# Altium PCB PCB1.PcbDoc
Units mm, origin at the board's own origin, x right, y up, seen from the top; angles counter-clockwise.
Board outline 145.1 x 117 mm, 2 copper layers (L1 (Sig), L2 (Sig)), stack 1.041 mm thick; 75 components, 45 nets, 245 pads, 288 vias.
Unrouted connection lines stored in the file: 1.
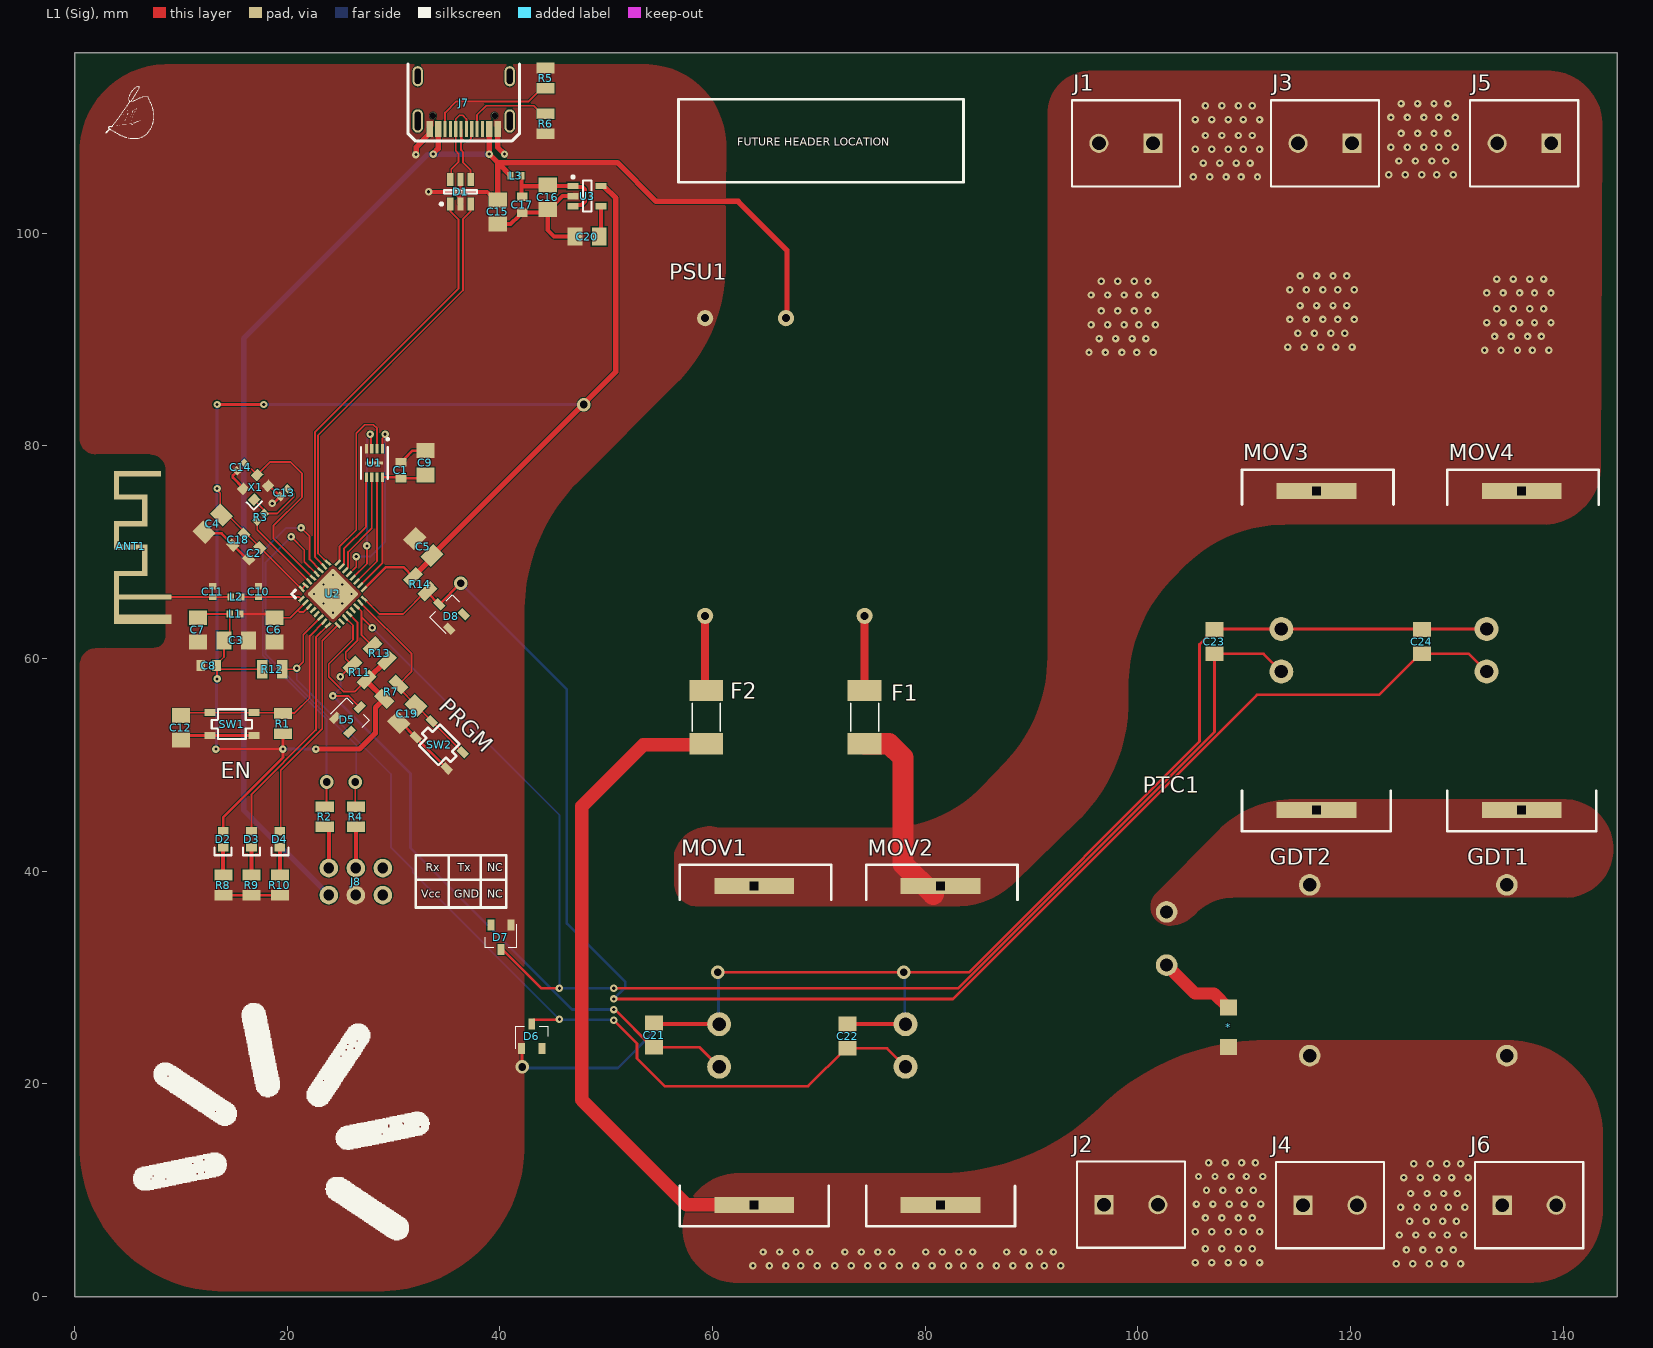
[diagram p0: L1 (Sig) view]
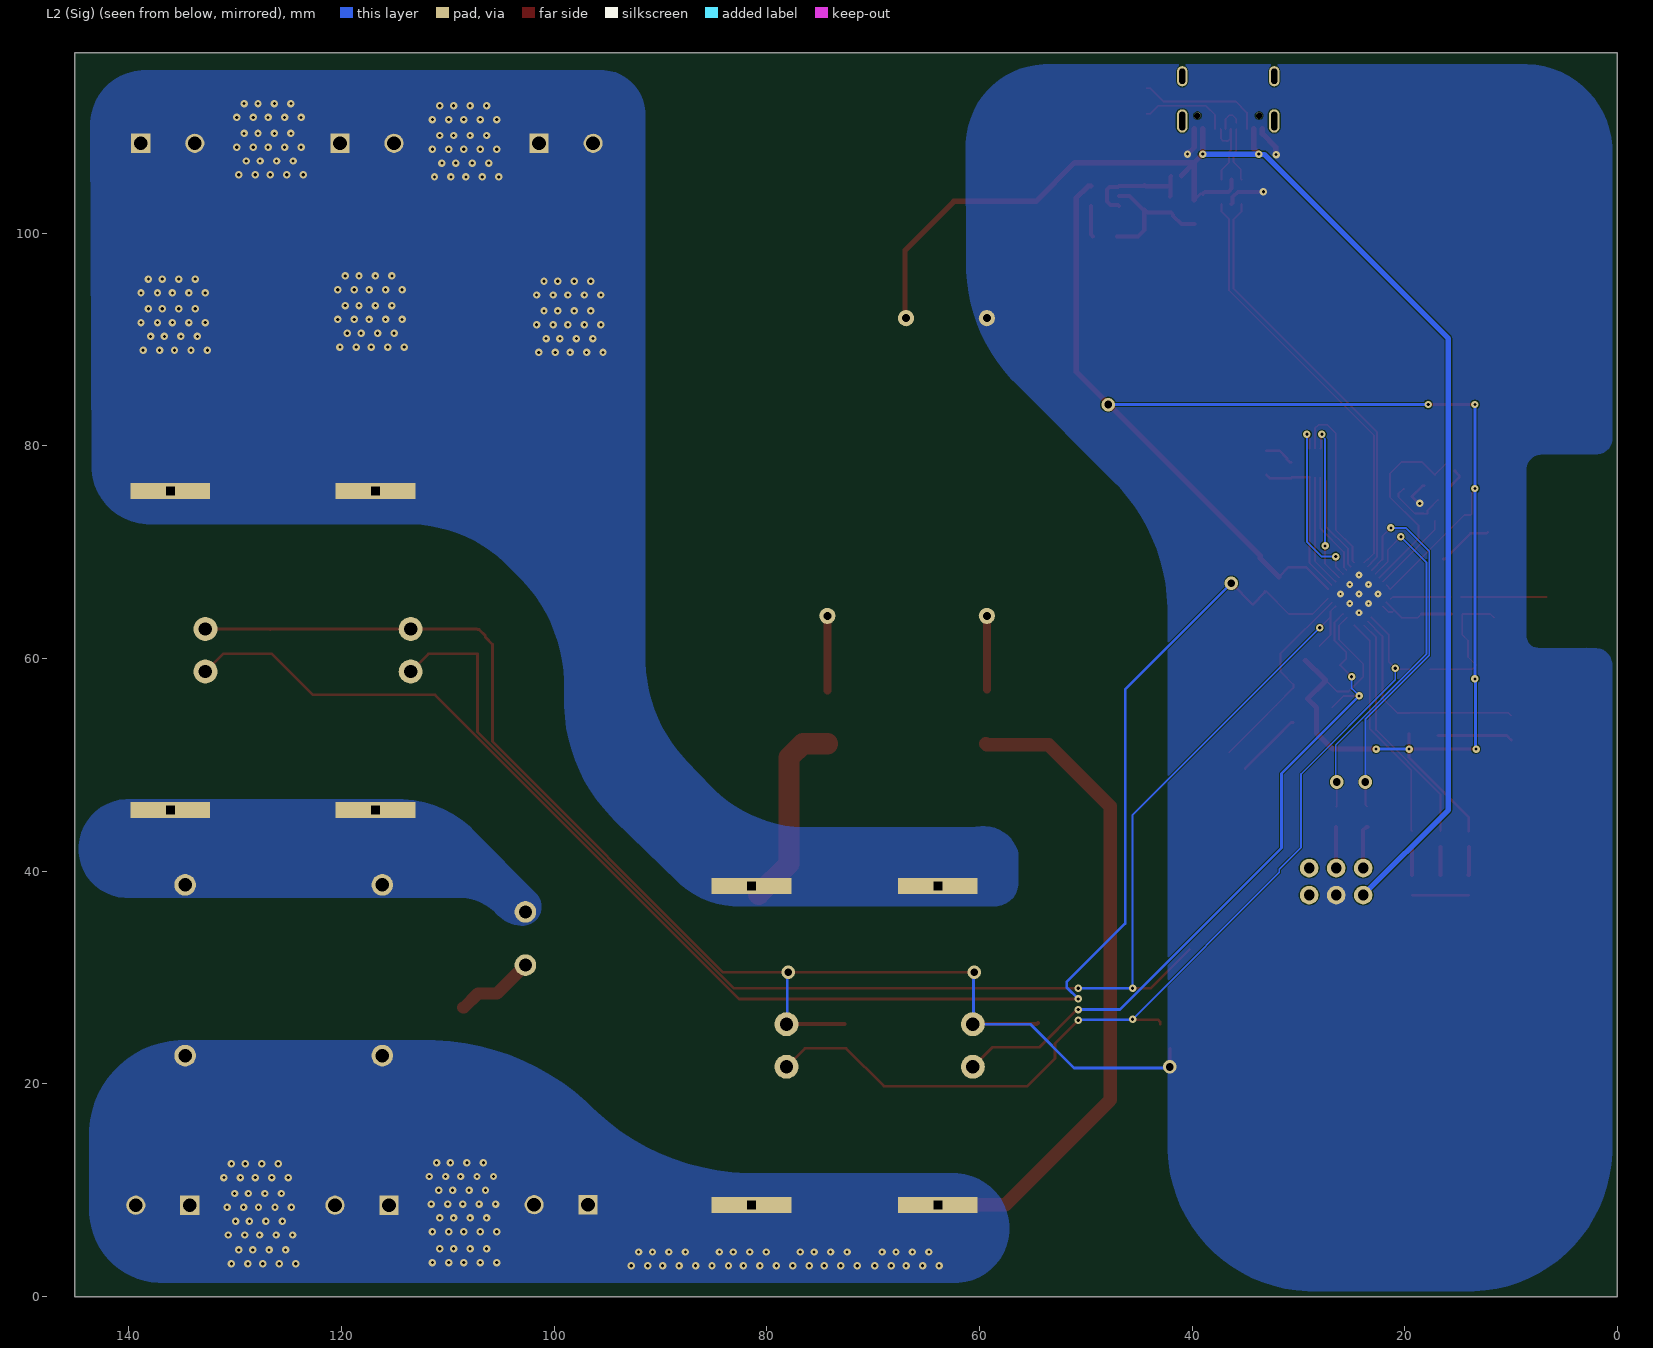
[diagram p1: L2 (Sig) view, seen from below]
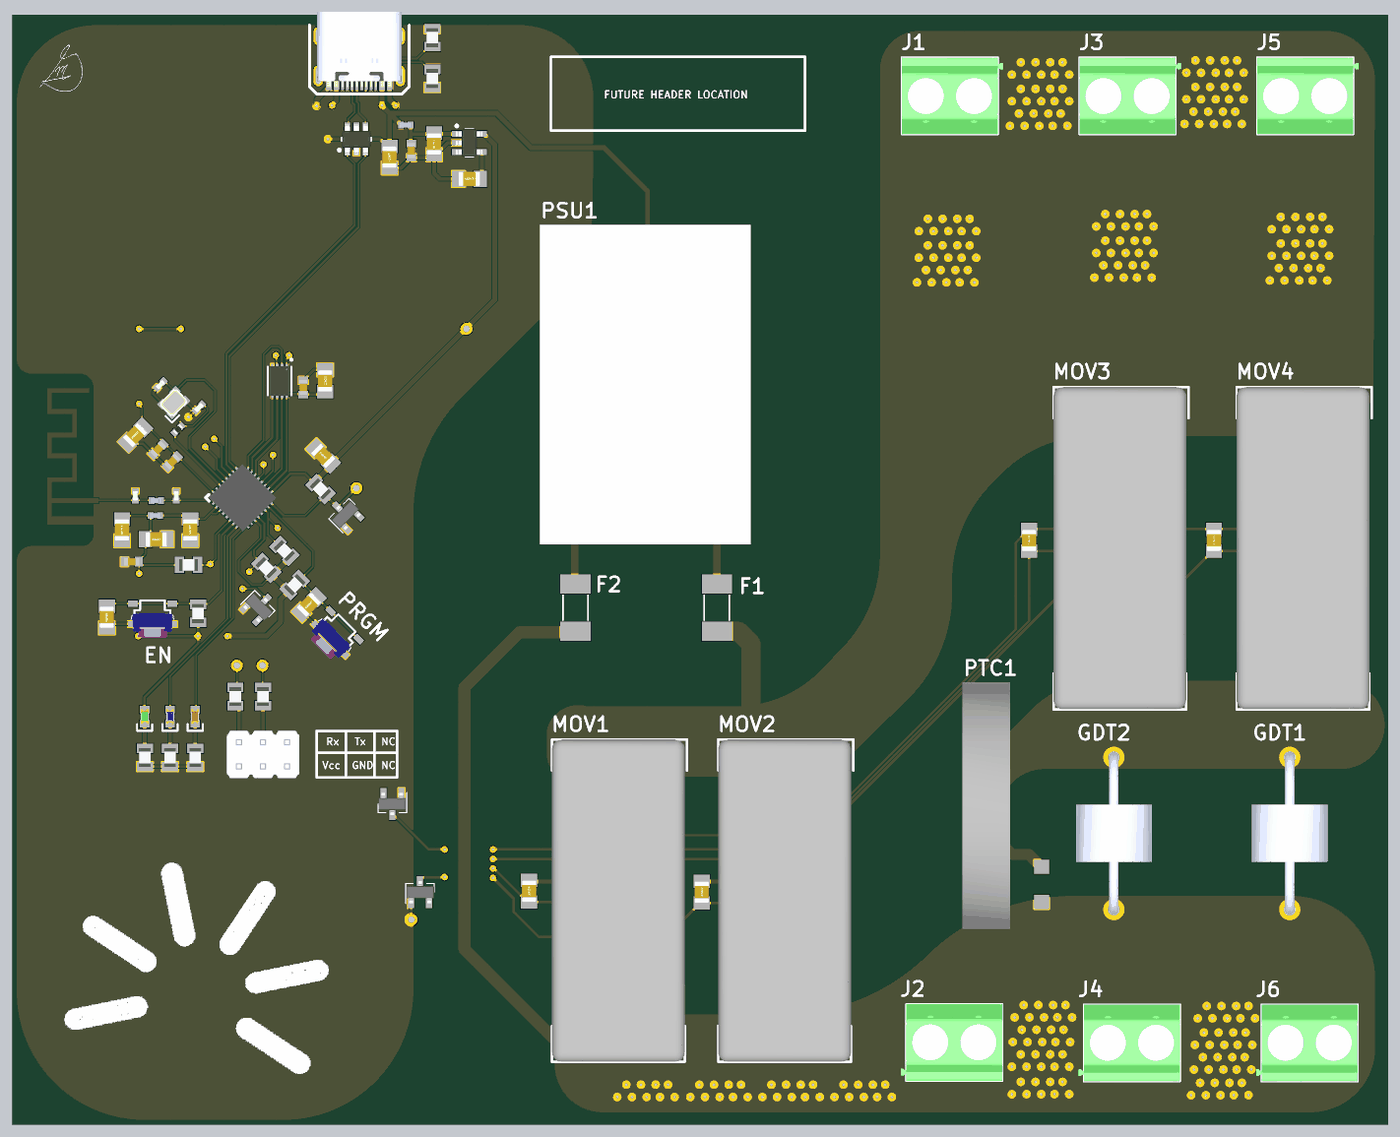
[diagram p2: 3D render of the assembled board from above, using the file's embedded part models]

## Layer stack, top to bottom
Top Solder: solder mask 0.0102, Solder Resist, Dk 3.5
L1 (Sig): signal copper 0.0356
Dielectric 2: prepreg 0.1295, PP-017, Dk 4.3
Dielectric 1: core 0.7112, Core-039, Dk 4.8
Dielectric 3: prepreg 0.1295, PP-017, Dk 4.3
L2 (Sig): signal copper 0.0356
Bottom Solder: solder mask 0.0102, Solder Resist, Dk 3.5

## Board outline
0,0 0,117 145.1,117 145.1,0

## Design rules (kind name [scope] priority, off if disabled: settings)
Clearance [All] p1: gap=0.1 ignorepadtopadclearanceinfootprint=FALSE
DiffPairsRouting [All] p1: maxlimit=0.254 minlimit=0.254 mostfreqgap=0.254 toplayer_minwidth=0.1 toplayer_maxwidth=0.381 toplayer_prefwidth=0.381 bottomlayer_minwidth=0.1 bottomlayer_maxwidth=0.381 bottomlayer_prefwidth=0.381 maxuncoupledlength=12.7
PlaneConnect [All] p1: planeconnectstyle=Direct reliefexpansion=0.508 reliefentries=4 reliefconductorwidth=0.254 reliefairgap=0.254
PolygonConnect [All] p1: connectstyle=Direct reliefconductorwidth=0.254 reliefentries=4 polygonreliefangle="90 Angle" airgapwidth=0.254
RoomDefinition Sheet2 [InComponentClass('Sheet2')] p1: confinementstyle=ConfineIn formatcopy=TRUE lockcomponents=FALSE outline 96.243,56.905 425.173,56.905 425.173,93.481 96.243,93.481
RoomDefinition Sheet1 [InComponentClass('Sheet1')] p2: confinementstyle=ConfineIn formatcopy=TRUE lockcomponents=FALSE outline 96.243,18.424 246.103,18.424 246.103,55.508 96.243,55.508
RoutingVias [All] p1: holewidth=0.711 width=1.27 viastyle="Through Hole" minholewidth=0.381 minwidth=0.254 maxholewidth=1.27 maxwidth=5.08
SolderMaskExpansion [All] p1: expansion=0.102 istentingtop=FALSE
Width [All] p1: maxlimit=2.54 minlimit=0.1 preferedwidth=0.254
28 further rules are at their usual default settings.

## Classes and differential pairs
differential pair class DIFF_USB: MCU_USB_D USB_D
component class Sheet2: ANT1 C1 C2 C3 C4 C5 C6 C7 C8 C9 C10 C11 C12 C13 C14 C15 C16 C17 C18 C19 C20 C21 C22 C23 C24 D1 D2 D3 D4 D5 D6 D7 D8 F1 F2 J7 J8 L1 L2 L3 PSU1 R1 R2 R3 R4 R5 R6 R7 R8 R9 R10 R11 R12 R13 R14 SW1 SW2 U1 U2 U3 X1
component class Sheet1: * GDT1 GDT2 J1 J2 J3 J4 J5 J6 MOV1 MOV2 MOV3 MOV4 PTC1
differential pair USB_D: +USB_D_P -USB_D_N
differential pair MCU_USB_D: +MCU_USB_D_P -MCU_USB_D_N

## Components (designator, comment, footprint, x,y, rotation, side; value= is the part's Value field where it differs from the comment)
* "IND_1812" IND_1812 108.538,23.48 r90 top
ANT1 "PCB Antenna 2.4GHz 50Ohm" ANT_IFA_USB_2_4GHZ_50R 9.1,63.7 r90 top
C1 "10u" CAP_0603 30.7,77.722 r270 top
C2 "10u" CAP_0603 16.9,69.9 r45 top
C3 "100n" CAP_0805 15.2,61.707 r180 top
C4 "100n" CAP_0805 13,72.7 r45 top
C5 "100n" CAP_0805 32.8,70.5 r315 top
C6 "100n" CAP_0805 18.8,62.7 r90 top
C7 "100n" CAP_0805 11.6,62.7 r90 top
C8 "10u" CAP_0603 12.6,59.35 r0 top
C9 "100n" CAP_0805 33,78.415 r270 top
C10 "3p3" CAP_0402 17.3,66.3 r270 top
C11 "3p3" CAP_0402 13,66.3 r270 top
C12 "100n" CAP_0805 10,53.5 r90 top
C13 "10p" CAP_0402 19.7,75.6 r45 top
C14 "10p" CAP_0402 15.634,78.017 r45 top
C15 "100n" CAP_0805 39.8,102.007 r90 top
C16 "100n" CAP_0805 44.5,103.4 r90 top
C17 "10u" CAP_0603 42.1,102.7 r90 top
C18 "10u" CAP_0603 15.4,71.2 r45 top
C19 "100n" CAP_0805 31.3,54.8 r45 top
C20 "100n" CAP_0805 48.2,99.7 r0 top
C21 "100n" CAP_0805 54.5,24.6 r270 top
C22 "100n" CAP_0805 72.7,24.5 r270 top
C23 "100n" CAP_0805 107.2,61.6 r270 top
C24 "100n" CAP_0805 126.7,61.6 r270 top
D1 "USBLC6-2SC6" STM-SOT23-6L_V 36.3,103.9 r90 top
D2 "GREEN" LED_0603_GREEN 13.978,43.017 r90 top
D3 "BLUE" LED_0603_BLUE 16.645,43.017 r90 top
D4 "RED" LED_0603_RED 19.312,43.017 r90 top
D5 "Diode, Zener, BZX84C18" SOT23 26,54.6 r45 top
D6 "Diode, Zener, BZX84C18" SOT23 43,24.5 r90 top
D7 "Diode, Zener, BZX84C18" SOT23 40.1,33.8 r270 top
D8 "Diode, Zener, BZX84C18" SOT23 35.1,64.3 r135 top
F1 "1A" FUSE_6125N 74.3,54.5 r90 top
F2 "1A" FUSE_6125N 59.4,54.5 r90 top
GDT1 "B88069X2250S102" B88069X2250S102 134.7,38.72 r270 top
GDT2 "B88069X2250S102" B88069X2250S102 116.158,38.72 r270 top
J1 "1729128" PHOE-1729128-2_V 98.868,108.467 r180 top
J2 "1729128" PHOE-1729128-2_V 99.338,8.645 r0 top
J3 "1729128" PHOE-1729128-2_V 117.599,108.467 r180 top
J4 "1729128" PHOE-1729128-2_V 118.069,8.6 r0 top
J5 "1729128" PHOE-1729128-2_V 136.33,108.467 r180 top
J6 "1729128" PHOE-1729128-2_V 136.8,8.6 r0 top
J7 "TYPE-C-31-M-12" TYPE-C-31-M-12 36.601,112.667 r180 top
J8 "PH2-06-UA" PH2-06-UA 23.911,40.303 r270 top
L1 "2n2" IND_0402 15.1,64.2 r0 top
L2 "2n2" IND_0402 15.2,65.8 r0 top
L3 "2n2" IND_0402 41.5,105.4 r180 top
MOV1 "TFMOV10M175" TFMOV10M175 63.921,8.622 r90 top
MOV2 "TFMOV10M175" TFMOV10M175 81.447,8.622 r90 top
MOV3 "TFMOV10M175" TFMOV10M175 116.791,45.786 r90 top
MOV4 "TFMOV10M175" TFMOV10M175 136.095,45.786 r90 top
PSU1 "IRM-02-3.3" IRM-02-3.3 59.306,64.021 r270 top
PTC1 "B59810C0120A070" B59810C0120A070 102.696,36.18 r270 top
R1 "5k1" RES_0805 19.6,53.893 r270 top
R2 "470" RES_0805 23.53,45.129 r270 top
R3 "22R" RES_0402 17.5,73.3 r45 top
R4 "470" RES_0805 26.451,45.129 r270 top
R5 "5k1" RES_0805 44.3,114.6 r270 top
R6 "5k1" RES_0805 44.3,110.3 r90 top
R7 "5k1" RES_0805 29.8,56.9 r225 top
R8 "1k" RES_0805 14,38.7 r90 top
R9 "1k" RES_0805 16.645,38.7 r90 top
R10 "1k" RES_0805 19.312,38.7 r90 top
R11 "5k1" RES_0805 26.8,58.7 r315 top
R12 "5k1" RES_0805 18.6,59 r180 top
R13 "5k1" RES_0805 28.7,60.5 r315 top
R14 "5k1" RES_0805 32.51,67.01 r135 top
SW1 "SKRPANE010" SKRPANE010 14.8,53.845 r180 top
SW2 "SKRPANE010" SKRPANE010 34.3,51.9 r135 top
U1 "W25Q16JVUXIQ" USON-8-2X3MM 28.2,78.4 r270 top
U2 "ESP32-C3" QFN32-5x5 24.292,66.084 r45 top
U3 "SPX3819M5-L-3-3/TR" SOT-23-5 48.2,103.5 r0 top
X1 "40MHz" XTAL_2520 17.031,76.112 r225 top

## Footprints (in the part's own frame and the unit in brackets; to place one, negate y for a bottom-side part, rotate by r counter-clockwise, add the part's x,y. Pads: shape width x height; smd on the part's side, far side on the other; paste and mask are expansions set on the pad)
ANT_IFA_USB_2_4GHZ_50R [mm]
  rect 5x0.5 smd paste-2539.97 mask+0.102: 1(2.05,5.15)
  rect 0.5x4.9 smd paste-2539.97 mask+0.102: 1(2.1,2.45)
  rect 0.5x2.64 smd paste-2539.97 mask+0.102: 1(4.3,3.58) 1(6.8,3.58) 1(9,3.58) 1(11.5,3.58)
  rect 2x0.5 smd paste-2539.97 mask+0.102: 1(5.55,2.51) 1(10.25,2.51)
  rect 2.7x0.5 smd paste-2539.97 mask+0.102: 1(7.9,5.15) 1(12.6,5.15)
  rect 0.5x3.94 smd paste-2539.97 mask+0.102: 1(13.7,2.93)
  rect 0.9x4.9 smd paste-2539.97 mask+0.102: 2(0,2.45)
B59810C0120A070 [mil] "PTC, 2.6OHM"
  round 80 hole 47.24: 1(0,0) 2(196.85,0)
  body extent -412,-98 612,98, height 1412
B88069X2250S102 [mil] "230V 20kA GDT"
  round 80 hole 50: 1(0,0) 2(631.89,0)
  body extent -20,-157 651,157, height 332
CAP_0402 [mm]
  rect 0.6x0.7 smd: 1(-0.5,0) 2(0.5,0)
  body extent -0.5,-0.26 0.5,0.26, height 0.37
CAP_0603 [mm]
  rect 0.8x1 smd: 1(-0.75,0) 2(0.75,0)
  body extent -0.8,-0.4 0.8,0.4, height 0.51
CAP_0805 [mm]
  rect 1.4x1.7 smd: 1(-1.143,0) 2(1.143,0)
  body extent -1.15,-0.76 1.15,0.79, height 1.01
FUSE_6125N [mm] "FUSE BRD MNT 4A 125V"
  rect 2x3.18 smd: 1(-2.5,0) 2(2.5,0)
  silkscreen extent -1.32,-1.32 1.32,1.32, body extent -3.18,-1.32 3.17,1.32, height 2.64
IND_0402 [mm]
  rect 0.6x0.7 smd: 1(-0.5,0) 2(0.5,0)
  body extent -0.56,-0.26 0.56,0.26, height 0.67
IND_1812 [mm]
  rect 1.5x1.6 smd: 1(0,0) 2(3.7,0)
  body extent -0.32,-1.65 3.87,1.65, height 3.2
IRM-02-3.3 [mil] "POWER SUPPLY, 3.3V"
  round 60 hole 30: 1(0,590.55) 2(0,0) 3(-1102.36,0) 4(-1102.36,299.21)
  body extent -1215,-144 112,730, height 591
LED_0603_BLUE [mm]
  rect 0.8x1 smd: A(0.75,0) K(-0.75,0)
  silkscreen extent -1.5,-0.8 -0.8,0.8, body extent -0.8,-0.4 0.8,0.4, height 0.6
LED_0603_GREEN [mm]
  rect 0.8x1 smd: A(0.75,0) K(-0.75,0)
  silkscreen extent -1.5,-0.8 -0.8,0.8, body extent -0.8,-0.4 0.8,0.4, height 0.6
LED_0603_RED [mm]
  rect 0.8x1 smd: A(0.75,0) K(-0.75,0)
  silkscreen extent -1.5,-0.8 -0.8,0.8, body extent -0.8,-0.4 0.8,0.4, height 0.6
PH2-06-UA [mm] "Six pin header (3x2)"
  round 1.75 hole 1.016: 1(0,0) 2(2.54,0) 3(0,2.54) 4(2.54,2.54) 5(0,5.08) 6(2.54,5.08)
  body extent -1.23,-1.27 3.77,6.35, height 8.25
PHOE-1729128-2_V [mm] "Receptacle, 2-Leads, Body 8.1x10.16mm, Pitch 5.08mm"
  rect 1.8x1.8 hole 1.3: 1(-2.54,0)
  round 1.8 hole 1.3: 2(2.54,0)
  silkscreen extent -5.08,-4.05 5.08,4.05, body extent -5.65,-4.05 5.08,4.05, height 10.01
QFN32-5x5 [mm]
  rrect10% 0.7x0.25 smd mask+0.05: 1(-2.4,1.75) 2(-2.4,1.25) 3(-2.4,0.75) 4(-2.4,0.25) 5(-2.4,-0.25) 6(-2.4,-0.75) 7(-2.4,-1.25) 8(-2.4,-1.75) 17(2.4,-1.75) 18(2.4,-1.25) 19(2.4,-0.75) 20(2.4,-0.25) 21(2.4,0.25) 22(2.4,0.75) 23(2.4,1.25) 24(2.4,1.75)
  rrect10% 0.25x0.7 smd mask+0.05: 9(-1.75,-2.4) 10(-1.25,-2.4) 11(-0.75,-2.4) 12(-0.25,-2.4) 13(0.25,-2.4) 14(0.75,-2.4) 15(1.25,-2.4) 16(1.75,-2.4) 25(1.75,2.4) 26(1.25,2.4) 27(0.75,2.4) 28(0.25,2.4) 29(-0.25,2.4) 30(-0.75,2.4) 31(-1.25,2.4) 32(-1.75,2.4)
  rrect10% 3.45x3.45 smd mask+0.07: 33(0,0)
  silkscreen extent -2.75,2.25 -2.25,2.75, body extent -2.5,-2.5 2.5,2.5, height 0.85
RES_0402 [mm]
  rect 0.6x0.7 smd: 1(-0.5,0) 2(0.5,0)
  body extent -0.5,-0.25 0.5,0.25, height 0.3
RES_0805 [mm]
  rect 1x1.7 smd: 1(-0.95,0) 2(0.95,0)
  body extent -1,-0.63 1,0.63, height 0.47
SKRPANE010 [mm]
  rect 1.05x0.65 smd: 12(-2.075,1.075) 12(2.075,1.075) 34(-2.075,-1.075) 34(2.075,-1.075)
  silkscreen extent -1.9,-1.4 1.9,1.4, body extent -2.3,-1.6 2.3,1.6, height 2.51
SOT23 [mm] "SOT23, 3-Leads, Body 2.9x1.3mm, Pitch 0.95mm, Lead Span 2.5mm, IPC Med Density"
  rect 1.05x0.65 smd: 1(-1.15,0.95) 2(-1.15,-0.95) 3(1.15,0)
  silkscreen extent -1.2,-1.5 0.93,1.5, body extent -1.18,-1.47 1.18,1.42, height 1
SOT-23-5 [mm] "SOT23, 5-Leads, Body 2,90x2,80mm, Pitch 0,95mm, IPC Medium Density"
  rect 1.05x0.6 smd: 1(-1.325,0.95) 2(-1.325,0) 3(-1.325,-0.95) 4(1.325,-0.95) 5(1.325,0.95)
  silkscreen extent -1.45,-1.45 0.4,1.92, body extent -1.4,-1.45 1.4,1.45, height 1.45
STM-SOT23-6L_V [mm] "SOT23, 6-Leads, Body 3.05x1.75mm, Pitch 0.95mm"
  rect 1.2x0.6 smd: 1(-1.15,0.95) 2(-1.15,0) 3(-1.15,-0.95) 4(1.15,-0.95) 5(1.15,0) 6(1.15,0.95)
  silkscreen extent -1.27,-1.55 0.15,1.92, body extent -1.6,-1.53 1.6,1.53, height 1.45
TFMOV10M175 [mm] "TFMOV, 10kA, 175V"
  rect 1.5x7.5 hole 0.8 square: 1(0,0) 2(30,0)
  round 2.25 hole 1.25: 3(13,3.3) 4(17,3.3)
  silkscreen extent -2.01,-7.24 31.99,7, body extent -2.01,-7 31.99,7, height 26.5
TYPE-C-31-M-12 [mm]
  rect 0.6x1.5 smd mask+0.07: A1B12(-3.2,2.85) B1A12(3.2,2.85)
  rect 0.6x1.5 smd mask+0.14: A4B9(-2.4,2.85) B4A9(2.4,2.85)
  rect 0.3x1.5 smd mask+0.14: A5(-1.25,2.85) A6(-0.25,2.85) A7(0.25,2.85) A8(1.25,2.85) B5(1.75,2.85) B6(0.75,2.85) B7(-0.75,2.85) B8(-1.75,2.85)
  round 0.6 hole 0.6 unplated mask+0.3: MH(-2.9,1.6) MH(2.9,1.6)
  oval 1x1.9 hole 0.55 slot 1.45 at 90 deg mask+0.05: SH(-4.325,-2.1) SH(4.325,-2.1)
  oval 1x2.2 hole 0.55 slot 1.75 at 90 deg mask+0.05: SH(-4.325,2.1) SH(4.325,2.1)
  silkscreen extent -5.25,-3.25 5.25,4, body extent -4.47,-4.65 4.47,3.25, height 3.32
USON-8-2X3MM [mm]
  rect 0.9x0.3 smd mask+0.13: 1(-1.35,0.75) 2(-1.35,0.25) 3(-1.35,-0.25) 4(-1.35,-0.75) 5(1.35,-0.75) 6(1.35,-0.25) 7(1.35,0.25) 8(1.35,0.75)
  rect 0.25x1.65 smd paste-0.1: 9(0,0)
  silkscreen extent -2.35,-1.25 1.5,1.35, body extent -1.55,-1.05 1.55,1.05, height 0.61
XTAL_2520 [mm]
  rrect10% 0.9x0.8 smd mask+0: 1(-0.925,-0.725) 2(0.925,-0.725) 3(0.925,0.725) 4(-0.925,0.725)
  silkscreen extent 0.54,0.4 1.6,1.36, body extent -1.25,-1 1.25,1, height 0.8

## Part data
*: Supplier Part Number 1=CC453232-470KLCT-ND, Supplier 1=Digi-Key
ANT1: library part ANT_IFA_USB_2_4GHZ_50R, "Inverted F 2.4GHz ISM PCB Antenna 50 Ohm", ComponentLink1Description=Datasheet, ComponentLink1URL=https://www.ti.com/lit/an/swra117d/swra117d.pdf
C1 C2 C8 C17 C18: library part CAP_0603_10V, "Capacitor SMD 0603 10V", LCSC=C19702, Manufacturer=Samsung, Manufacturer Part Number=CL10A106KP8NNNC
C3 C4 C5 C6 C7 C9 C12 C15 C16 C19 C20 C21 C22 C23 C24: library part CAP_0805_50V, "Capacitor SMD 0805 50V"
C10 C11: library part CAP_0402_50V, "Capacitor SMD 0402 50V", LCSC=C1565, Manufacturer=FH, Manufacturer Part Number=0402CG3R3C500NT
C13 C14: library part CAP_0402_50V, "Capacitor SMD 0402 50V", LCSC=C32949, Manufacturer=Samsung, Manufacturer Part Number=CL05C100JB5NNNC
D1: library part CMP-2000-05378-1, "Very low capacitance ESD protection, 3.5 pF, -40 to 125 degC, 6-Pin SOT23, RoHS, Tape and Reel", Capacitance Value=3.5pF, Clamping Voltage=17V, LCSC=C7519, Leakage Current=0.15uA, Manufacturer=STMicroelectronics, Operating Temp Range=-40Cto125C, Operating Temperature Classification=Automotive, Operating Temperature Max Deg. C=125C, Operating Temperature Min Deg. C=-40C, Package / Case=SOT-23, Package Description="6-Pin Small Outline Transistor, Body 2.925 x 1.625 mm, Pitch 0.95 mm", Package Reference=SOT23-6L, Peak Pulse Current=5A, Reverse Breakdown Voltage=6V, Reverse Stand-off Voltage=5V, Test Current (It)=1mA, Clamping Voltage (Max)=17V, Configuration=Dual, Datasheet URL=http://www.st.com/st-web-ui/static/active/en/resource/technical/document/datasheet/CD00050750.pdf, Datasheet Version="Rev. 5, 10/2011", Direction Type=Uni-Directional, Leakage Current (Max)=0.15uA, Manufacturer URL=http://www.st.com/, Mounting=SurfaceMount, Mounting Style=SurfaceMount, Number of Elements=1, Packaging=TapeandReel, Pin Count=6, Polarity=Uni-Directional, Product Depth (mm)=1.75mm, Product Height (mm)=1.3mm, Product Length (mm)=3.05mm, Rad Hardened=No, Suppressor Type=DiodeArrays, Working Voltage=5V, Working Voltage (Max)=5V
D2: library part LED_0603_GREEN, "LED 0603 GREEN SMD", LCSC=C72043
D3: library part LED_0603_BLUE, "LED 0603 BLUE SMD"
D4: library part LED_0603_RED, "LED 0603 RED SMD"
D5 D6 D7 D8: library part Diode_BZX84C18, "MMBZ5235B Series 350 mW 6.8 V 10 mA Surface Mount Zener Diode - SOT-23", Case/Package=SOT-23, Forward Voltage=900mV, Manufacturer=Diodes, Manufacturer P/N=BZX84C18-7-F, Manufacturer Part Number=MMBZ5235B-7-F, Max Operating Temperature=150°C, Max Power Dissipation=350mW, Max Reverse Current=3uA, Max Reverse Leakage Current=100nA, Min Operating Temperature=-65°C, Output Current=18mA, Package Quantity=3000, Supplier Part Number 1=BZX84C18-FDICT-ND, Test Current=5mA, Tolerance=6%, Voltage Rating (DC)=18V, Category="Zener Diodes", ComponentLink1Description=https://datasheet.ciiva.com/8347/ds18011-8347785.pdf?src-supplier=Avnet, ComponentLink1URL=https://datasheet.ciiva.com/8347/ds18011-8347785.pdf?src-supplier=Avnet, ComponentLink2Description=https://datasheet.ciiva.com/890/ds18011-890886.pdf?src-supplier=Digi-Key, ComponentLink2URL=https://datasheet.ciiva.com/890/ds18011-890886.pdf?src-supplier=Digi-Key, ComponentLink3Description=https://datasheet.ciiva.com/890/ds18011-890887.pdf?src-supplier=Digi-Key, ComponentLink3URL=https://datasheet.ciiva.com/890/ds18011-890887.pdf?src-supplier=Digi-Key, ComponentLink4Description=https://datasheet.ciiva.com/890/ds18011-890888.pdf?src-supplier=Digi-Key, ComponentLink4URL=https://datasheet.ciiva.com/890/ds18011-890888.pdf?src-supplier=Digi-Key, Height=1mm, Impedance=5R, Lead Free="Lead Free", Length=2.9mm, Mounting Technology="Surface Mount", Number of Pins=3, Packaging="Tape and Reel", Peak Reverse Current=100nA, Pins=3, Power Dissipation=350mW, Power Rating=350mW, Pricing 2="1=0.15, 10=0.108, 100=0.0583, 500=0.04582, 1000=0.03182 (USD)", Radiation Hardening=No, RoHS=Yes, RoHS Compliant=Yes, Series=-, Stock 2=50399, Supplier 1=Digi-Key, Supplier 2=Digi-Key, Supplier Part Number 2=MMBZ5235B-FDICT-ND, Termination=SMD/SMT, Voltage Tolerance=6%, Weight=0.000282oz, Width=2.4mm, Working Voltage=18V, Zener Current=5mA, Zener Voltage=18V
F1 F2: library part FUSE_4A_SMT, "0422001.MR", Case/Package=SMD/SMT, Current Rating=4A, DC Cold Resistance=24mR, Manufacturer=Bel, Manufacturer P/N=SST4, Max Operating Temperature=125°C, Min Operating Temperature=-55°C, Supplier Part Number 1=507-1070-1-ND, Voltage Rating (AC)=125V, Approvals=CSA,CE,cULus, ComponentLink1Description=https://belfuse.com/resources/StewartConnector/SST.pdf?src-supplier=Digi-Key, ComponentLink1URL=https://belfuse.com/resources/StewartConnector/SST.pdf?src-supplier=Digi-Key, Fuse Type="Board Mount (Cartridge Style Excluded)", Height=0.1inch, Lead Free="Lead Free", Length=0.24inch, Mount="Surface Mount", Number of Pins=2, Supplier 1=Digi-Key, Voltage Rating (DC)=125V, Width=0.1inch
GDT1 GDT2: "230V, 20kA, 2-pole GDT"
J1 J2 J3 J4 J5 J6: library part CMP-2000-05815-1, "PCB Terminal Block, 13.5 A, 400 V, 2-Pin THD, RoHS, Bulk", Color=Green, Current=10A, Current Rating=13500mA, Flammability Rating="UL94 V-0", Manufacturer="Phoenix Contact", Max Current Rating=13.5A, Max Operating Temperature=100°C, Max Supply Voltage=400V, Min Operating Temperature=-20°C, Package Description="2-Pin Through Hole Device, Body 8.1 x 10.16 mm, Pitch 5.08 mm", Package Quantity=50, Package Reference=1729128-2, Package Version=03/2015, Test Voltage=4kV, Voltage=300V, Approvals=UL,CSA, Category="Terminal Blocks", ComponentLink1Description=https://datasheet.ciiva.com/823/1729128-823779.pdf?src-supplier=Digi-Key, ComponentLink1URL=https://datasheet.ciiva.com/823/1729128-823779.pdf?src-supplier=Digi-Key, ComponentLink2Description=https://datasheet.ciiva.com/15169/getdatasheetpartid-199310-15169845.pdf?src-supplier=Verical, ComponentLink2URL=https://datasheet.ciiva.com/15169/getdatasheetpartid-199310-15169845.pdf?src-supplier=Verical, ComponentLink3Description=https://datasheet.ciiva.com/16046/1729128-16046181.pdf?src-supplier=Onlinecomponents.com, ComponentLink3URL=https://datasheet.ciiva.com/16046/1729128-16046181.pdf?src-supplier=Onlinecomponents.com, ComponentLink4Description=https://datasheet.ciiva.com/14607/70054405-14607157.pdf?src-supplier=Allied+Electronics, ComponentLink4URL=https://datasheet.ciiva.com/14607/70054405-14607157.pdf?src-supplier=Allied+Electronics, ComponentLink5Description=https://datasheet.ciiva.com/29218/743664-da-01-en-printklemmenblock-mkdsn-1-5-2-5-08-29218154.pdf?src-supplier=Conrad, ComponentLink5URL=https://datasheet.ciiva.com/29218/743664-da-01-en-printklemmenblock-mkdsn-1-5-2-5-08-29218154.pdf?src-supplier=Conrad, Connector Type=Screw, Contact Material=Tin, Datasheet URL=https://datasheet.ciiva.com/16046/1729128-16046181.pdf, Datasheet Version=12/2013, Depth=8.1mm, Height=13.5mm, Housing Color=Green, Housing Material=Polyamide, Insulation Material=Nylon, Lead Free="Lead Free", Length=8.1mm, Manufacturer Part Number=1729128, Manufacturer URL=http://www.phoenixcontact.com/, Mount="Through Hole", Mounting Technology=ThroughHole, No. of Positions=2, No. of Rows=1, Number of Circuits=2, Number of Contacts=2, Number of Levels=1, Number of Pins=2, Number of Poles=2, Number of Positions=2, Number of Positions Per Level=2, Number of Rows=1, Orientation=Horizontal, Package URL=https://www.phoenixcontact.com/online/portal/pi/pxc/product_detail_page/!ut/p/b1/3VdJjqNKFDxLH8AFycySyWY2ozFsEPOMMQaDOX1XedGL_1Vdm5YXJleknhSKeBkvI6EA8ncAo3AYoDhBQGco6KN7VURTdemj9us_IEKEZo_YHiPAEWEFmDGOHMORkqKYCORBZxgL7ZoaZYcbFFUZ3fqxSY6GOuxydWUuHqz1ynmMFygu583Bob0Ewr6Sd_l-5m-kAueHiB0jpRwZwe58wwtkpxtMYd_LmGcDRU02dRNEyWt6Y2ti5pSyJ_reIkzIulrqApdnbT11V5jnCKbYNCvhEM1MCpPByat_X379-iThf08CI5GfOPqfBeS3BRoBOdD55AKVv0iLwCMq-2BrzXWSGRH7pUGD9uwXQjiph3xL0DKQwdGa0JImiIOmBNOestqgwTHSSs2oOep-78apyXQBvNi8ZLaFjvjWvcaUEBu0MC6Wbe-d6mB0FAebo2lUWinqYaZs5DAYzV0RP9yitUjnGJ0iI9xhZkT42OCQNUJJhkgWINNQLP2JFP6OpMg3JCVg70jqHT0lvKOnhHf0lPuOnnLf0VPuWx6_dxwUIvwk5WMkT0kLL1mh61l2yZVSzG3pYV_bqo-mj6uMKwKwdnnW8Jh5RTOJzMOA5c-eJDaZQw4mTMPH02PvS_ZAqNVjVTo2WyYLkwH_KU1mmmG5kjRhDqPXLwwVHvVOjCM60-fpXvTDfMGW1PVFVS1r4e4yVDk4ZdNbkUHvqPqQSeian4UD39fNKmachqdJ1NJbyk8rXT9mXTvPk3oE5meulKGgiruPJek-4I9hTT6G8ZLOyRSm2RRVbThERQad5OS28hdt4YW4vG0stgYYzsWsK4_7y6DZMjJSCqri1kyiZR5vD7pwIrNR7QwPHTcLTI5qT7eRlpHrdGiupYlqQDJ7zy_CND8fWWBoLRXxk1RVcXiBQwbTD4Xi7KL-FuO94t9xaqweXzH, Packaging=Bulk, Packing=Bulk, PartNumber=1729128, Pitch=5.08mm, Pricing 1="1=1.09000, 10=1.04700, 50=1.00100, 100=0.97370, 250=0.91000, 500=0.83720, 1000=0.77350, 2500=0.73710, 5000=0.69160 (USD)", Radiation Hardening=No, REACH SVHC="No SVHC", RoHS=TRUE, RoHS Compliant=Yes, Series=MKDSN, Stock 1=30124, Supplier 1=Digi-Key, Termination=Solder, Voltage Rating=400V, Weight=0.069842oz, Width=13.5mm, Wire Gauge (Max)=26AWG, Wire Gauge (Min)=14AWG, Wire/Cable Gauge=26AWG
J7: "USB Type C Connector Horizontal SMT", LCSC=C165948, Manufacturer="Koren Hroparts", Manufacturer Part Number=TYPE-C-31-M-12
L1 L2 L3: library part IND_0402, "Inductor SMD 0402", LCSC=C412264, Manufacturer=Murata, Manufacturer Part Number=LQW15AN2N2G80D
MOV1 MOV2 MOV3 MOV4: "TFMOV, 175V, 10KA"
PTC1: "PTC, 2.6OHM"
R1 R2 R4 R5 R6 R7 R8 R9 R10 R11 R12 R13 R14: library part RES_0805, "Resistor SMD 0805"
R3: library part RES_0402, "Resistor SMD 0402", LCSC=C25092, Manufacturer=UNI-ROYAL, Manufacturer Part Number=0402WGF220JTCE
SW1 SW2: "Tactile Switch SMD SPST", LCSC=C470426, Manufacturer="Alps Alpine", Manufacturer Part Number=SKRPANE010
U1: "16M-BIT SERIAL FLASH MEMORY WITH / DUAL/QUAD SPI USON-8", LCSC=C2843335, Manufacturer=Winbond, Manufacturer Part Number=W25Q16JVUXIQ
U2: "Ultra­Low­Power SoC with RISC­V Single­Core CPU Supporting IEEE 802.11b/g/n (2.4 GHz Wi­Fi) and Bluetooth® 5 (LE)", LCSC=C2838500, Manufacturer=Espressif, Manufacturer Part Number=ESP32-C3
U3: "500mA +3.3V Low-Noise LDO Voltage Regulator", LCSC=C9055, Manufacturer=MaxLinear, Manufacturer Part Number=SPX3819M5-L-3-3/TR
X1: library part XTAL_2520, "Crystal SMD 2520", LCSC=C255973, Manufacturer="Seiko Epson", Manufacturer Number=Q24FA20H0020900, Frequency=40MHz

## Via types
v1: diameter 0.7, hole 0.3, L1 (Sig) to L2 (Sig), 272 vias
v2: diameter 0.65, hole 0.2, L1 (Sig) to L2 (Sig), tented both sides, 9 vias
v3: diameter 1.27, hole 0.711, L1 (Sig) to L2 (Sig), 7 vias

## Nets (pads, with @x,y where several pads share a name; then routed paths per layer and width w, separated by ;. In a path a pad name is that pad's centre, name@x,y a point inside that pad or via, vN(x,y) a via of type N, cw(c..) or ccw(c..) an arc to the next point about the centre after c; other vN are vias at no path point)
+3V3: C2.2 C3.2 C4.2 C5.2 C7.2 C8.2 C18.2 D2.A L1.1 R1.2 R7.2 R11.2 R12.2 R13.2 R14.2 U2.11 U2.17 U2.31 U2.32 U3.5 | length 193.2
  L1 (Sig) w0.17: C7.2 11.957,64.2 L1.1 14.6,62.25 C3.2 14.057,60.157 13.35,59.45 C8.2 13.4,59.3 C8.2@13.4,59.265 ; C8.2@13.35,59.315 C8.2@13.4,59.265 ; v1(13.4,58.1) C8.2@13.4,59.265 ; v1(13.4,76) 13.4,75.857 13.702,75.554 13.702,73.614 C4.2 14.393,73.508 U2.32 U2.31 ; R12.2 13.665,59 C8.2@13.4,59.265 ; U2.11 26.2,63.115 26.2,61.8 23.9,59.5 23.9,58.3 25.3,56.9 26.344,56.9 R11.2 R11.2@27.522,58.028 ; C5.2@33.608,69.451 C5.2
  L1 (Sig) w0.254: v1(13.3,51.5) v1(19.6,51.5) ; v1(13.4,83.9) v1(17.8,83.9) ; D2.A 13.978,45.078 19.6,50.7 v1(19.6,51.5) ; R1.2 v1(19.6,51.5) ; U2.17 29.283,68.6 30.92,68.6 R14.2
  L1 (Sig) w0.508: v1(22.7,51.5) 26.8,51.5 28.3,53 28.3,55.4 R7.2 27.472,57.885 R11.2 ; R11.2@27.522,58.028 29.322,59.828 R13.2 ; R14.2 C5.2@33.608,69.451 ; C5.2 50.9,86.984 50.9,103.3 49.75,104.45 U3.5
  L2 (Sig) w0.17: v1(13.3,51.5) v1@13.35,51.55 ; v1@13.35,58.05 v1(13.4,58.1)
  L2 (Sig) w0.254: v1@13.35,51.55 v1@13.35,58.05 ; v1(13.4,58.1) v1(13.4,76) v1(13.4,83.9) ; v1(17.8,83.9) v3(47.9,83.9) ; v1(19.6,51.5) v1(22.7,51.5)
+3V3_RF: C6.2 L1.2 U2.2 U2.3 | length 8.2
  L1 (Sig) w0.17: C6.2@18.443,64.2 C6.2 20.283,63.843 20.997,64.557 ; U2.2 20.997,64.557 ; U2.3 21.547,64.4 21.154,64.4 20.997,64.557
  L1 (Sig) w0.254: L1.2 C6.2@18.443,64.2
+VBUS: C15.2 D1.5 J7.A4B9 J7.B4A9 J8.2 L3.2 PSU1.4 | length 139.1
  L1 (Sig) w0.254: C15.2@38.977,103.723 39.227,103.723 C15.2
  L1 (Sig) w0.381: D1.5 36.3,104.2 36.6,103.9 38.8,103.9 C15.2@38.977,103.723
  L1 (Sig) w0.508: v1(33.734,107.449) 33.734,107.501 34.201,107.968 J7.B4A9 ; J7.A4B9 v1(39.001,107.449) 39.8,106.65 ; C15.2 39.8,106.65 ; L3.2 41,105.45 39.8,106.65 ; PSU1.4 67,92.115 67,98.4 62.4,103 54.7,103 51.05,106.65 39.8,106.65
  L2 (Sig) w0.508: J8.2 15.9,45.774 15.9,90.1 33.213,107.413 33.698,107.413 v1(33.734,107.449) v1(39.001,107.449)
+VBUS_FILT: C16.2 C17.2 L3.1 U3.1 U3.3 | length 10.6
  L1 (Sig) w0.381: L3.1 42.05,105.35 42.05,104.425 ; C17.2 42.05,103.5 42.05,104.425 ; U3.3 46.984,102.66 47.66,102.66 48,103 48,104.1 47.76,104.34 46.984,104.34 U3.1 44.593,104.45 C16.2 44.382,104.425 42.05,104.425
+VCC_SPI: C1.2 C9.2 U1.8 U2.18 | length 15.2
  L1 (Sig) w0.17: U2.18 28.95,68.974 U1.8
  L1 (Sig) w0.254: U1.8 30.622,77.05 C1.2 32.7,76.972 C9.2
ANT_RF: ANT1.1 C11.2 L2.1 | length 8.1
  L1 (Sig) w0.17: ANT1.1@6.65,65.8 C11.2 L2.1
CHIP_EN: C12.2 R1.1 SW1.34 U2.7 | length 20.6
  L1 (Sig) w0.17: C12.2 10.277,54.92 12.725,54.92 16.875,54.92 19.523,54.92 R1.1 19.657,54.9 20.7,54.9 22.1,56.3 22.1,62.124 U2.7
GPIO2: C22.2 D6.3 MOV2.3 R12.1 U2.6 | length 91.4
  L1 (Sig) w0.17: R12.1 20.8,59 21.5,59.7 21.5,62.231 U2.6
  L1 (Sig) w0.254: D6.3 43,25.85 43.198,26.048 45.553,26.048 v1(45.6,26.094) ; v1(50.7,26) 52.9,23.8 52.9,22.4 55.5,19.8 68.993,19.8 72.55,23.357 C22.2 76.412,23.357 MOV2.3
  L2 (Sig) w0.17: v1(20.9,59.1) 20.9,58 29.75,49.15 29.75,42.25 31.8,40.2 31.8,39.894 v1(45.6,26.094)
  L2 (Sig) w0.254: v1(45.6,26.094) 45.647,26.047 50.653,26.047 v1(50.7,26)
GPIO6: C21.2 D5.3 MOV1.3 R11.1 U2.12 | length 67.4
  L1 (Sig) w0.17: v1(24.3,56.5) 25.726,56.5 D5.3 ; v1(25,58.3) 26.072,59.372 R11.1 25.5,60 25.5,60.6 26.6,61.7 26.6,63.422 U2.12
  L1 (Sig) w0.254: v1(50.7,27) 50.807,27 54.35,23.457 C21.2 58.786,23.457 MOV1.3
  L2 (Sig) w0.17: v1(24.3,56.5) 25,57.2 v1(25,58.3)
  L2 (Sig) w0.254: v1(24.3,56.5) 31.6,49.2 31.6,42.184 46.784,27 v1(50.7,27)
GPIO8: C23.2 D7.3 MOV3.3 R13.1 U2.14 | length 139.8
  L1 (Sig) w0.17: U2.14 27,64.437 27,63.9 ; v1(28,62.9) 27,63.9 ; R13.1 27,62.2 27,63.9
  L1 (Sig) w0.254: D7.3@40.25,32.65 43.198,29.702 43.9,29 v1(45.6,29) ; v1(50.7,29) 83.099,29 107.2,53.101 C23.2 111.82,60.457 MOV3.3
  L2 (Sig) w0.17: v1(28,62.9) 45.6,45.3 v1(45.6,29)
  L2 (Sig) w0.254: v1(45.6,29) v1(50.7,29)
GPIO9: C19.2 R7.1 SW2.34 U2.15 | length 19.1
  L1 (Sig) w0.17: U2.15 31.7,60.444 31.7,58.8 30.472,57.572 30.472,57.245 C19.2 32.112,55.608 33.593,54.127 SW2.34@36.527,51.193
GPIO10: C24.2 D8.3 MOV4.3 R14.1 U2.16 | length 154.2
  L1 (Sig) w0.17: U2.16 28.651,64.2 30.9,64.2 33.038,66.338 R14.1
  L1 (Sig) w0.254: R14.1 33.182,66.218 D8.3 34.313,65.113 v3(36.3,67.1) ; v1(50.7,28) 82.6,28 111.2,56.6 122.693,56.6 126.55,60.457 C24.2 131.124,60.457 MOV4.3
  L2 (Sig) w0.254: v3(36.3,67.1) 46.3,57.1 46.3,35.1 51.8,29.6 51.8,29.1 v1(50.7,28)
LDO_BYP: C20.2 U3.4 | length 2.9
  L1 (Sig) w0.381: C20.2 49.525,99.882 U3.4
LED_3V3_K: D2.K R8.2 | length 2.6
  L1 (Sig) w0.381: D2.K 13.978,39.672 R8.2
LED_A: D3.A U2.8 | length 22.4
  L1 (Sig) w0.17: D3.A 16.645,47.245 22.7,53.3 22.7,62.017 U2.8
LED_A_K: D3.K R9.2 | length 2.6
  L1 (Sig) w0.381: R9.2 D3.K
LED_B: D4.A U2.9 | length 21.6
  L1 (Sig) w0.17: D4.A 19.4,43.855 19.4,49.5 23.3,53.4 23.3,61.7 24.75,63.15 U2.9
LED_B_K: D4.K R10.2 | length 2.6
  L1 (Sig) w0.381: R10.2 D4.K
LINE: F1.1 J1.1 J1.2 J3.1 J3.2 J5.1 J5.2 MOV1.2 MOV2.2 MOV3.2 MOV4.2 | length 18.2
  L1 (Sig) w2: F1.1 76.6,52 77.9,50.7 77.9,40.7 80.747,37.853
  other v1: 95.4,88.8 96.95,88.8 98.5,88.8 99.9,88.8 101.45,88.8 132.6,89 134.15,89 135.7,89 137.1,89 138.65,89 114.1,89.3 115.65,89.3 117.2,89.3 118.6,89.3 120.15,89.3 96.35,90.1 97.9,90.1 99.45,90.1 100.75,90.1 133.55,90.3 135.1,90.3 136.65,90.3 137.95,90.3 115.05,90.6 116.6,90.6 118.15,90.6 119.45,90.6 95.6,91.4 97.15,91.4 98.7,91.4 100.1,91.4 101.65,91.4 132.8,91.6 134.35,91.6 135.9,91.6 137.3,91.6 138.85,91.6 114.3,91.9 115.85,91.9 117.4,91.9 118.8,91.9 120.35,91.9 96.55,92.7 98.1,92.7 99.65,92.7 100.95,92.7 133.75,92.9 135.3,92.9 136.85,92.9 138.15,92.9 115.25,93.2 116.8,93.2 118.35,93.2 119.65,93.2 95.6,94.2 97.15,94.2 98.7,94.2 100.1,94.2 101.65,94.2 132.8,94.4 134.35,94.4 135.9,94.4 137.3,94.4 138.85,94.4 114.3,94.7 115.85,94.7 117.4,94.7 118.8,94.7 120.35,94.7 96.55,95.5 98.1,95.5 99.65,95.5 100.95,95.5 133.75,95.7 135.3,95.7 136.85,95.7 138.15,95.7 115.25,96 116.8,96 118.35,96 119.65,96 105.2,105.3 106.75,105.3 108.3,105.3 109.7,105.3 111.25,105.3 123.6,105.5 125.15,105.5 126.7,105.5 128.1,105.5 129.65,105.5 106.15,106.6 107.7,106.6 109.25,106.6 110.55,106.6 124.55,106.8 126.1,106.8 127.65,106.8 128.95,106.8 105.4,107.9 106.95,107.9 108.5,107.9 109.9,107.9 111.45,107.9 123.8,108.1 125.35,108.1 126.9,108.1 128.3,108.1 129.85,108.1 106.35,109.2 107.9,109.2 109.45,109.2 110.75,109.2 124.75,109.4 126.3,109.4 127.85,109.4 129.15,109.4 105.4,110.7 106.95,110.7 108.5,110.7 109.9,110.7 111.45,110.7 123.8,110.9 125.35,110.9 126.9,110.9 128.3,110.9 129.85,110.9 106.35,112 107.9,112 109.45,112 110.75,112 124.75,112.2 126.3,112.2 127.85,112.2 129.15,112.2
LNA_IN: C10.2 L2.2 U2.1 | length 5.7
  L1 (Sig) w0.17: L2.2 C10.2 21.137,65.8 21.312,65.624 U2.1
MCU_UART0_RX: R2.1 U2.27 | length 35.8
  L1 (Sig) w0.17: v1(21.3,72.3) 22.1,71.5 22.1,69.337 U2.27 ; R2.1 23.7,46.249 v3(23.7,48.4)
  L2 (Sig) w0.17: v1(21.3,72.3) 19.9,72.3 17.7,70.1 17.7,60.3 23.7,54.3 v3(23.7,48.4)
MCU_UART0_TX: R4.1 U2.28 | length 34.5
  L1 (Sig) w0.17: v1(20.364,71.457) 21.6,70.221 21.6,69.13 U2.28 ; v3(26.4,48.4) 26.4,46.13 R4.1
  L2 (Sig) w0.17: v1(20.364,71.457) 17.97,69.064 17.97,60.412 26.5,51.882 26.5,48.5 v3(26.4,48.4)
MCU_USB_D_N: D1.3 U2.25 | length 40.1
  L1 (Sig) w0.17: U2.25 23.525,69.326 23.471,69.326 22.899,69.899 22.899,80.999 36.524,94.624 36.524,101.339 37.25,102.065 D1.3
MCU_USB_D_P: D1.1 U2.26 | length 40.4
  L1 (Sig) w0.17: U2.26 23.171,68.973 23.171,69.026 22.599,69.599 22.599,81.298 36.1,94.8 36.1,101.315 35.35,102.065 D1.1
MOV1_2: ANT1.2 C1.1 C2.1 C3.1 C4.1 C5.1 C6.1 C7.1 C8.1 C9.1 C10.1 C11.1 C12.1 C13.1 C14.1 C15.1 C16.1 C17.1 C18.1 C19.1 C20.1 C21.1 C22.1 C23.1 C24.1 D1.2 D5.1 D6.1 D7.1 D8.1 J7.A1B12 J7.B1A12 J8.4 MOV1.4 MOV2.4 MOV3.4 MOV4.4 PSU1.3 R5.1 R6.1 R8.1 R9.1 R10.1 SW1.12 SW2.12 U1.4 U1.9 U2.33 U3.2 X1.2 X1.4 | length 188.7
  L1 (Sig) w0.17: v1@18.6,74.457 18.6,74.5 v1(18.6,74.6)
  L1 (Sig) w0.254: C12.1 10.413,52.77 12.725,52.77 SW1.12@16.875,52.77 ; C4.1 12.298,71.786 13.814,71.786 16.23,69.37 C2.1 ; R8.1 R9.1 R10.1 ; C14.1 15.28,77.625 14.883,77.228 14.883,77.017 15.864,76.036 X1.2 ; X1.4 18.339,76.253 C13.1 v1@18.6,74.5 ; C19.1 30.688,53.992 32.073,52.607 SW2.12@35.007,49.673 ; C1.1 30.8,78.472 31.073,78.745 31.073,78.845 31.786,79.558 C9.1 ; D6.1 42.075,23.325 42.075,21.625 v3(42.1,21.6) ; v3(60.5,30.5) 84.099,30.5 105.8,52.201 105.8,61.343 106.477,62.02 106.477,62.17 107.05,62.743 C23.1 107.243,62.786 MOV3.4 126.657,62.786 C24.1 126.743,62.786 MOV4.4
  L1 (Sig) w0.381: v1(33.3,103.9) 35.7,103.9 36.191,103.409 36.191,102.859 D1.2 ; C15.1 41.014,100.864 41.791,101.64 41.791,101.74 42,101.95 C17.1 44.193,101.95 C16.1 ; U3.2 45.9,103.5 45.7,103.3 45.693,103.3 44.5,102.107 44.5,100.3 45.1,99.7 C20.1 ; C21.1 54.621,25.622 MOV1.4 ; C22.1 72.721,25.622 MOV2.4
  L1 (Sig) w0.508: v1(32.1,107.4) 32.137,107.437 32.137,108.103 33.401,109.367 J7.B1A12 ; J7.A1B12 39.801,108.086 40.434,107.453 v1(40.434,107.449) v1@40.434,107.402
  L2 (Sig) w0.254: v3(42.1,21.6) 42.2,21.5 51.1,21.5 55.222,25.622 MOV1.4 60.561,25.682 60.561,30.439 v3(60.5,30.5) ; v3(78,30.5) 78.073,30.426 78.073,25.696 MOV2.4
  other v2: 24.292,64.316 23.408,65.2 25.176,65.2 22.524,66.084 24.292,66.084 26.06,66.084 23.408,66.968 25.176,66.968 24.292,67.852
Net*_2: *.2 PTC1.2 | length 7.5
  L1 (Sig) w1.143: PTC1.2 105.376,28.5 107.168,28.5 108.488,27.18 *.2
NetF1_2: F1.2 PSU1.1 | length 7
  L1 (Sig) w0.381: F1.2 F1.2@74.306,57.006
  L1 (Sig) w0.762: F1.2@74.306,57.006 PSU1.1
NetF2_2: F2.2 PSU1.2 | length 7.1
  L1 (Sig) w0.381: F2.2@59.306,57.094 F2.2
  L1 (Sig) w0.762: F2.2@59.306,57.094 PSU1.2
NetGDT1_1: GDT1.1 GDT2.1 MOV3.1 MOV4.1 PTC1.1
NEUTRAL: *.1 F2.1 GDT1.2 GDT2.2 J2.1 J2.2 J4.1 J4.2 J6.1 J6.2 MOV1.1 MOV2.1 | length 62.1
  L1 (Sig) w1.27: F2.1 59.3,51.9 53.5,51.9 47.7,46.1 47.7,18.5 57.578,8.622 MOV1.1
  other v1: 63.8,2.9 65.35,2.9 66.9,2.9 68.3,2.9 69.85,2.9 71.5,2.9 73.05,2.9 74.6,2.9 76,2.9 77.55,2.9 79.1,2.9 80.65,2.9 82.2,2.9 83.6,2.9 85.15,2.9 86.7,2.9 88.25,2.9 89.8,2.9 91.2,2.9 92.75,2.9 124.3,3.1 125.85,3.1 127.4,3.1 128.8,3.1 130.35,3.1 105.4,3.2 106.95,3.2 108.5,3.2 109.9,3.2 111.45,3.2 64.75,4.2 66.3,4.2 67.85,4.2 69.15,4.2 72.45,4.2 74,4.2 75.55,4.2 76.85,4.2 80.05,4.2 81.6,4.2 83.15,4.2 84.45,4.2 87.65,4.2 89.2,4.2 90.75,4.2 92.05,4.2 125.25,4.4 126.8,4.4 128.35,4.4 129.65,4.4 106.35,4.5 107.9,4.5 109.45,4.5 110.75,4.5 124.6,5.8 126.15,5.8 127.7,5.8 129.1,5.8 130.65,5.8 105.4,6.1 106.95,6.1 108.5,6.1 109.9,6.1 111.45,6.1 125.55,7.1 127.1,7.1 128.65,7.1 129.95,7.1 106.35,7.4 107.9,7.4 109.45,7.4 110.75,7.4 124.7,8.4 126.25,8.4 127.8,8.4 129.2,8.4 130.75,8.4 105.5,8.7 107.05,8.7 108.6,8.7 110,8.7 111.55,8.7 125.65,9.7 127.2,9.7 128.75,9.7 130.05,9.7 106.45,10 108,10 109.55,10 110.85,10 125,11.2 126.55,11.2 128.1,11.2 129.5,11.2 131.05,11.2 105.7,11.3 107.25,11.3 108.8,11.3 110.2,11.3 111.75,11.3 125.95,12.5 127.5,12.5 129.05,12.5 130.35,12.5 106.65,12.6 108.2,12.6 109.75,12.6 111.05,12.6
SPI_CLK: U1.6 U2.22 | length 9.8
  L1 (Sig) w0.17: U2.22 25.717,68.57 25.717,70.017 27.95,72.25 U1.6
SPI_DI: U1.5 U2.23 | length 9
  L1 (Sig) w0.17: U2.23 25.336,68.896 25.336,70.336 27.419,72.419 U1.5@27.419,76.7
SPI_DO: U1.2 U2.24 | length 17.2
  L1 (Sig) w0.17: U2.24 24.911,69.178 24.911,70.511 26.5,72.1 26.5,81.2 27.3,82 28.1,82 28.45,81.65 U1.2
SPI_NCS: U1.1 U2.21 | length 16.8
  L1 (Sig) w0.17: U2.21 26.5,68.646 v1(26.5,69.6) ; U1.1 28.95,80.707 29.2,80.957 v1(29.2,81.1)
  L2 (Sig) w0.17: v1(26.5,69.6) 27.8,69.6 29.2,71 v1(29.2,81.1)
SPI_NHLD: U1.7 U2.19 | length 10.6
  L1 (Sig) w0.17: U2.19 28.45,69.181 U1.7
SPI_NWP: U1.3 U2.20 | length 15.6
  L1 (Sig) w0.17: U2.20 27.5,68.938 v1(27.5,70.6) ; v1(27.8,81.1) 27.885,81.015 27.885,79.815 U1.3
  L2 (Sig) w0.17: v1(27.5,70.6) 27.5,80.657 27.8,80.957 v1(27.8,81.1)
UART0_RX: J8.1 R2.2 | length 4.1
  L1 (Sig) w0.381: R2.2 23.601,44.179 23.911,43.869 J8.1
UART0_TX: J8.3 R4.2 | length 3.9
  L1 (Sig) w0.381: J8.3 R4.2
USB_A5: J7.A5 R6.2 | length 8.4
  L1 (Sig) w0.17: J7.A5 37.851,111.151 38.7,112 43.2,112 43.95,111.25 R6.2
USB_B5: J7.B5 R5.2 | length 11.9
  L1 (Sig) w0.17: J7.B5 34.851,111.351 35.9,112.4 42.7,112.4 43.95,113.65 R5.2
USB_D_N: D1.4 J7.A7 J7.B7 | length 8.1
  L1 (Sig) w0.17: D1.4 37.25,105.95 36.524,106.676 36.524,107.676 36.351,107.849 J7.A7 36.416,109.752 36.416,108.884 36.63,108.67 36.77,108.67 36.8,108.7 37.1,108.7 37.286,108.886 37.286,109.752 J7.B7
USB_D_P: D1.6 J7.A6 J7.B6 | length 7.8
  L1 (Sig) w0.17: D1.6 35.435,105.135 35.435,106.035 36.1,106.7 36.1,107.5 35.851,107.749 J7.B6 ; J7.B6@35.851,110.351 35.851,110.751 36.2,111.1 36.5,111.1 36.851,110.749 J7.A6
XTAL_IN: C13.2 R3.2 X1.3 | length 6.1
  L1 (Sig) w0.17: X1.3 16.89,74.922 17.854,73.958 R3.2 17.889,73.618 18.193,73.618 18.228,73.654 19.054,73.654 20.6,75.2 20.6,75.5 20.146,75.954 C13.2
XTAL_N: C14.2 U2.29 X1.1 | length 19.3
  L1 (Sig) w0.17: C14.2 16.081,78.371 X1.1 18.394,78.5 20.3,78.5 21.4,77.4 21.4,75.2 18.7,72.5 18.7,71.322 U2.29
XTAL_P: R3.1 U2.30 | length 7.7
  L1 (Sig) w0.17: R3.1 17.182,72.911 17.182,72.134 U2.30
pads on no net: D5.2 D6.2 D7.2 D8.2 J7.A8 J7.B8 J7.MH J7.SH J8.5 J8.6 U2.4 U2.5 U2.10 U2.13

## Polygon pours and split planes (outlines as drawn)
LINE on L1 (Sig) "LINE_L01_P000" (solid, pour order 0): 138.524,115.3 136.8,115.3 95.6,115.3 ccw(c95.6,111.2) 91.5,111.2 91.5,60.076 cw(c77.405,60.075) 87.567,50.308 85.294,47.943 cw(c76.27,56.616) 76.27,44.1 60.6,44.1 ccw(c59.7,40.8) 56.4,41.7 56.4,38.9 ccw(c58.6,38.9) 58.6,36.7 82.854,36.7 ccw(c82.854,44.667) 88.422,38.968 94.379,44.788 ccw(c83.427,56) 99.1,56 99.1,57.417 cw(c113.544,57.417) 103.331,67.631 104.416,68.716 cw(c113.793,59.339) 113.793,72.6 138.076,72.6 ccw(c138.076,78.049) 143.525,78.024 143.676,110.124 ccw(c138.524,110.149)
NetGDT1_1 on L1 (Sig) "NETGDT1_1_L01_P009" (solid, pour order 9): 140,46.8 114.7,46.8 ccw(c114.7,36.721) 107.543,43.818 101.704,37.93 ccw(c102.967,36.678) 102.967,34.9 ccw(c102.967,38.119) 105.243,35.843 105.474,36.074 cw(c108.917,32.63) 108.917,37.5 140.1,37.5 ccw(c140.1,42.1) 144.7,42.1 ccw(c140,42.1)
NEUTRAL on L1 (Sig) "NEUTRAL_L01_P006" (solid, pour order 6): 136.9,1.3 62.3,1.3 cw(c62.3,6.4) 57.2,6.4 cw(c62.4,6.4) 62.4,11.6 81.185,11.6 ccw(c81.185,33.488) 96.478,17.828 cw(c111.876,2.06) 111.876,24.1 134.9,24.1 cw(c134.9,15.3) 143.7,15.3 143.7,8.1 cw(c136.9,8.1)
MOV1_2 on L1 (Sig) "MOV1_2_L01_P004" (solid, pour order 4): 53.603,115.9 8.9,115.9 ccw(c8.75,107.65) 0.5,107.8 0.5,80.7 ccw(c1.998,80.698) 2,79.2 7.1,79.2 cw(c7.111,77.711) 8.6,77.7 8.6,65 8.6,64.2 8.6,63.2 8.6,62.2 cw(c7.4,62.2) 7.4,61 7.1,61 3,61 2.894,61.002 2.3,61 2.1,61 ccw(c2.1,59.4) 0.5,59.4 0.5,58.5 0.5,14 ccw(c14,14) 14,0.5 28.6,0.5 ccw(c28.6,14.2) 42.3,14.2 42.3,64.2 cw(c59.71,64.389) 47.266,76.566 56.631,85.931 ccw(c45.54,97.023) 61.225,96.961 61.27,108.203 ccw(c53.603,108.233)
MOV1_2 on L1 (Sig) "MOV1_2_L01_P003" (solid, pour order 3): 27.6,80.2 27.6,78.9 ccw(c27.9,78.9) 27.9,78.6 30.5,78.6 30.5,78.2 28,78.2 cw(c28,78.9) 27.3,78.9 27.3,80.2
MOV1_2 on L2 (Sig) "MOV1_2_L02_P011" (solid, pour order 11): 53.603,115.9 8.9,115.9 ccw(c8.75,107.65) 0.5,107.8 0.5,80.7 ccw(c1.998,80.698) 2,79.2 7.1,79.2 cw(c7.111,77.711) 8.6,77.7 8.6,65 8.6,64.2 8.6,63.2 8.6,62.2 cw(c7.4,62.2) 7.4,61 7.1,61 3,61 2.894,61.002 2.3,61 2.1,61 ccw(c2.1,59.4) 0.5,59.4 0.5,58.5 0.5,14 ccw(c14,14) 14,0.5 28.6,0.5 ccw(c28.6,14.2) 42.3,14.2 42.3,64.2 cw(c59.71,64.389) 47.266,76.566 56.631,85.931 ccw(c45.54,97.023) 61.225,96.961 61.27,108.203 ccw(c53.603,108.233)
LINE on L2 (Sig) "LINE_L02_P010" (solid, pour order 10): 138.467,115.333 136.742,115.333 95.542,115.333 ccw(c95.542,111.233) 91.442,111.233 91.442,60.108 cw(c77.347,60.108) 87.509,50.341 85.236,47.976 cw(c76.212,56.649) 76.212,44.133 60.542,44.133 ccw(c59.642,40.833) 56.342,41.733 56.342,38.933 ccw(c58.542,38.933) 58.542,36.733 82.797,36.733 ccw(c82.797,44.7) 88.364,39.001 94.321,44.821 ccw(c83.369,56.032) 99.042,56.032 99.042,57.45 cw(c113.486,57.45) 103.273,67.663 104.358,68.749 cw(c113.735,59.372) 113.735,72.633 138.018,72.633 ccw(c138.018,78.082) 143.467,78.057 143.618,110.157 ccw(c138.467,110.181)
NetGDT1_1 on L2 (Sig) "NETGDT1_1_L02_P001" (solid, pour order 1): 140,46.8 114.7,46.8 ccw(c114.7,36.721) 107.543,43.818 101.704,37.93 ccw(c102.967,36.678) 102.967,34.9 ccw(c102.967,38.119) 105.243,35.843 105.474,36.074 cw(c108.917,32.63) 108.917,37.5 140.1,37.5 ccw(c140.1,42.1) 144.7,42.1 ccw(c140,42.1)
NEUTRAL on L2 (Sig) "NEUTRAL_L02_P002" (solid, pour order 2): 136.9,1.3 62.3,1.3 cw(c62.3,6.4) 57.2,6.4 cw(c62.4,6.4) 62.4,11.6 81.185,11.6 ccw(c81.185,33.488) 96.478,17.828 cw(c111.876,2.06) 111.876,24.1 134.9,24.1 cw(c134.9,15.3) 143.7,15.3 143.7,8.1 cw(c136.9,8.1)

## Silkscreen, mask and mechanical layers (free items; w line width, h text height)
Top Overlay:
  drawing of 18 lines, arcs and shapes, not listed
  text "FUTURE HEADER LOCATION" at 62.327,108.227 h0.76
  text "PRGM" at 34.159,55.4 h1.52 r315
  text "EN" at 13.754,48.754 h1.52
  text "Rx" at 33.027,40.027 h0.75
  text "Tx" at 36.027,40.027 h0.75
  text "NC" at 38.827,40.027 h0.75
  text "Vcc" at 32.627,37.527 h0.75
  text "GND" at 35.727,37.527 h0.75
  text "NC" at 38.827,37.527 h0.75
Mechanical 1:
  the board outline again, w0.254

## Text inside footprints (layer, text, board x,y; h text height)
D2: Mechanical 13 "+" at 13.37,44.334 h0.5 r90
D3: Mechanical 13 "+" at 16.037,44.334 h0.5 r90
D4: Mechanical 13 "+" at 18.704,44.334 h0.5 r90